# Altium PCB P01-LEDS.PcbDoc (part 2 of 2)
Units mm, origin at the board's own origin, x right, y up, seen from the top; angles counter-clockwise.
Board outline 51.05 x 97.12 mm, 4 copper layers (Top Layer, Mid Layer 1, Mid Layer 2, Bottom Layer), stack 1.57 mm thick; 35 components, 34 nets, 169 pads, 53 vias.
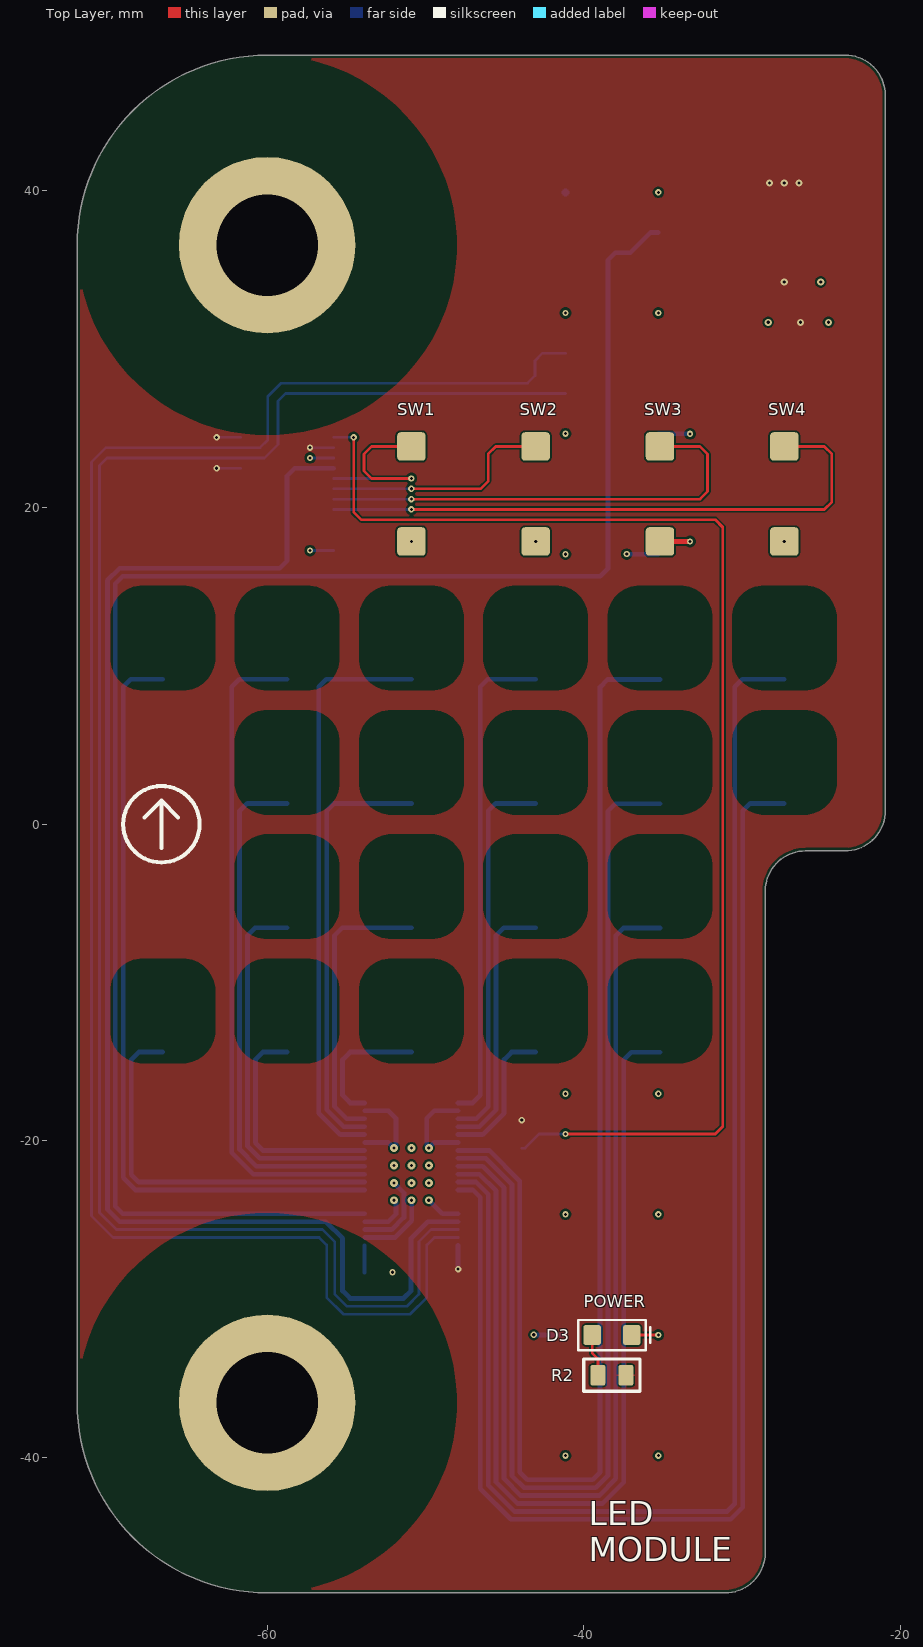
[diagram p0: Top Layer view]

## Silkscreen, mask and mechanical layers (free items; w line width, h text height) (continued)
Mechanical 5: (continued)
  circle w0.254: c-60,-36.561 r12
  circle w0.254: c-60,36.561 r3.3
  circle w0.254: c-60,-36.561 r3.3
  circle w0.254: c-46.961,0 r14.375
  lines w0.254: -28.536,-4.238 -28.536,-46.021 cw(c-31.076,-46.022) -31.076,-48.562 -60,-48.561 cw(c-60,-36.561) -72,-36.561 -72,36.561 cw(c-60,36.561) -60,48.562 -23.495,48.561 cw(c-23.495,46.022) -20.955,46.022 -20.955,0.842 ; -28.411,-4.239 cw(c-25.871,-4.239) -25.871,-1.699 -23.331,-1.698 -23.37,-1.698 ccw(c-23.37,0.841) -20.83,0.841 ; 20.955,0.841 ccw(c23.495,0.841) 23.495,-1.699 23.456,-1.698 25.996,-1.698 cw(c25.996,-4.239) 28.536,-4.239 28.536,-46.021 ccw(c31.076,-46.022) 31.076,-48.562 60,-48.561 ccw(c60,-36.561) 72,-36.561 72,36.561 ccw(c60,36.561) 60,48.562 23.495,48.561 ccw(c23.495,46.022) 20.955,46.022 20.955,0.842
Mechanical 14:
  circle w0.064: c-46.961,0 r0.032